# EAGLE board dual_encoder_shield_5v (EAGLE 9.6.2)
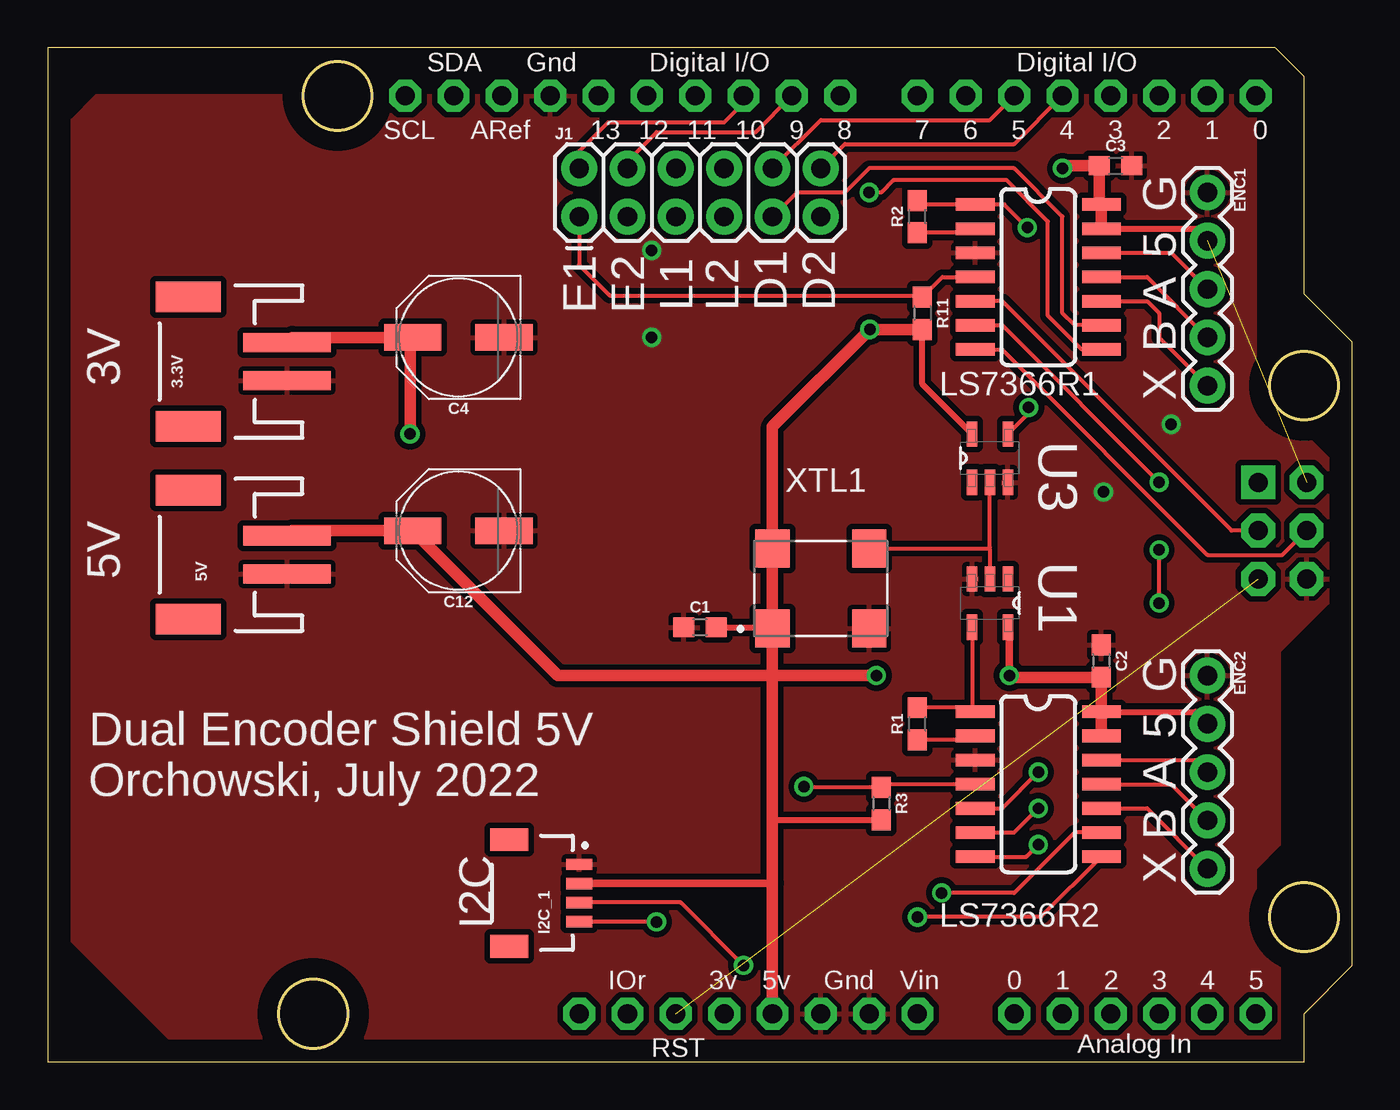
[diagram p0: board, top side]
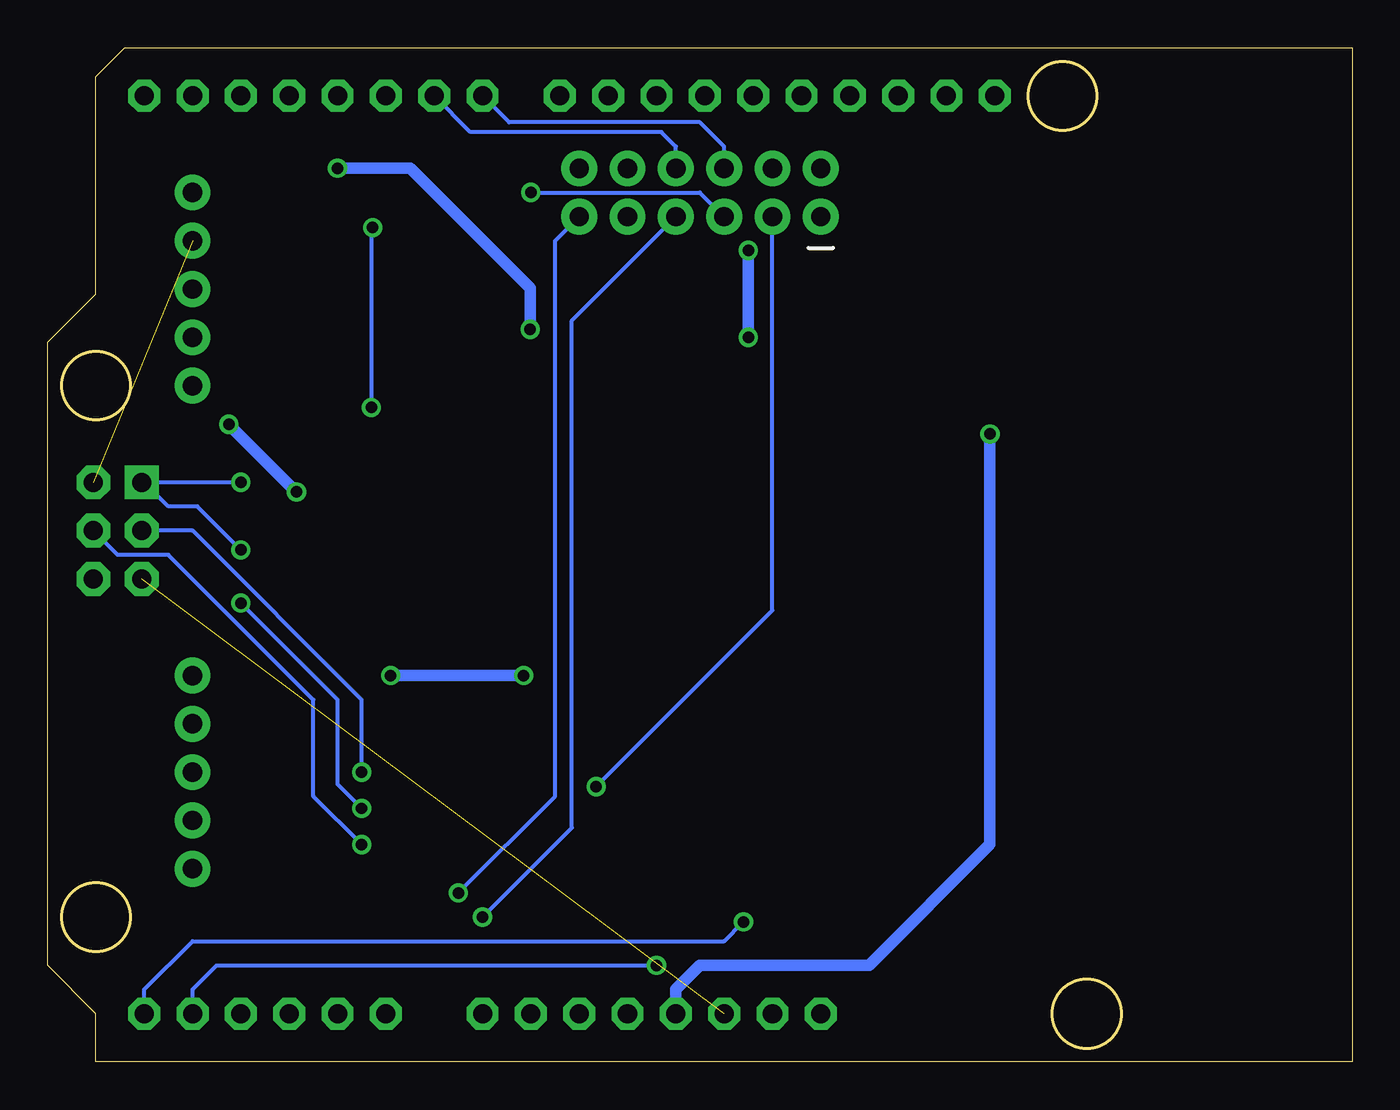
[diagram p1: board, bottom side, seen from below]

Size 55.68 x 51.87 mm. Coordinates in mm from the lower left corner, seen from the top.
Outline: circle at 3.09,50.08 radius 1.8
Outline: circle at 53.89,34.84 radius 1.8
Outline: circle at 53.89,6.9 radius 1.8
Outline: circle at 1.82,1.82 radius 1.82
Copper layers (1*16): Top 0.035mm / dielectric 1.5mm / Bottom 0.035mm
Design rules "default": minimum track width 6mil, minimum drill 0.35mm, track to track 6mil, track to pad 6mil, pad to pad 6mil, via to via 6mil, smd to smd 6mil, copper to edge 40mil, drill to drill 6mil, minimum pad ring 10mil, minimum via ring 8mil, stop-mask expansion 4mil, vias tented up to drill 0mil, thermal gap 10mil

## Footprints (pad centres in the part's own frame; a part is rotated, then mirrored left to right if it is on the bottom)
JST-2-SMD = smd 1 x 4.6: 1 -1,-3.7; 2 1,-3.7 | smd 1.6 x 3.4: NC1 -3.4,1.5; NC2 3.4,1.5
0603 = smd 1.1 x 1: 1 -0.85,0; 2 0.85,0
PANASONIC_D = smd 3 x 1.4: + 2.4,0; - -2.4,0
1X05 = drill 1.016 pad 1.88: 1 0,0; 2 2.54,0; 3 5.08,0; 4 7.62,0; 5 10.16,0
JST04_1MM_RA = smd 0.6 x 1.35: 1 -1.5,0; 2 -0.5,0; 3 0.5,0; 4 1.5,0 | smd 1.2 x 2: NC1 2.8,-3.675; NC2 -2.8,-3.675
2X6 = drill 1.016 pad 1.88: 1 0,0; 2 0,2.54; 3 2.54,0; 4 2.54,2.54; 5 5.08,0; 6 5.08,2.54; 7 7.62,0; 8 7.62,2.54; 9 10.16,0; 10 10.16,2.54; 11 12.7,0; 12 12.7,2.54
SOIC14 = smd 2.032 x 0.66: 1 -3.315,4.445; 2 -3.315,3.175; 3 -3.315,1.905; 4 -3.315,0.635; 5 -3.315,-0.635; 6 -3.315,-1.905; 7 -3.315,-3.175; 8 3.315,-3.175; 9 3.315,-1.905; 10 3.315,-0.635; 11 3.315,0.635; 12 3.315,1.905; 13 3.315,3.175; 14 3.315,4.445
ARDUINOR3_ICSP = drill 1 pad 1.676 octagon: 3V 35.56,2.54; 5V 38.1,2.54; A0 50.8,2.54; A1 53.34,2.54; A2 55.88,2.54; A3 58.42,2.54; A4 60.96,2.54; A5 63.5,2.54; AREF 23.876,50.8; D0 63.5,50.8; D1 60.96,50.8; D2 58.42,50.8; D3 55.88,50.8; D4 53.34,50.8; D5 50.8,50.8; D6 48.26,50.8; D7 45.72,50.8; D8 41.656,50.8; D9 39.116,50.8; D10 36.576,50.8; D11 34.036,50.8; D12 31.496,50.8; D13 28.956,50.8; GND 26.416,50.8; GND@1 43.18,2.54; GND@2 40.64,2.54; IOREF 30.48,2.54; RESERVED 27.94,2.54; RESET 33.02,2.54; SCL 18.796,50.8; SDA 21.336,50.8; VIN 45.72,2.54 | drill 1 pad 1.778 octagon: 5V_ICSP 66.167,30.48; GND@3 66.167,25.4; MOSI 66.167,27.94; RESET_ICSP 63.627,25.4; SCK 63.627,27.94 | drill 1 pad 1.778 square: MISO 63.627,30.48
SOT95P280X145-5N = smd 1.321 x 0.559: 1 -1.27,0.94; 2 -1.27,0; 3 -1.27,-0.94; 4 1.27,-0.94; 5 1.27,0.94
OSC_CB3LV-5I-50M000000 = smd 1.8 x 2: 1 -2.54,-2.1; 2 2.54,-2.1; 3 2.54,2.1; 4 -2.54,2.1

## Placement (x,y rotation side)
3.3V  [JST-2-SMD]  -3.26,36.11 90 top
5V  [JST-2-SMD]  -3.26,25.95 90 top
C1  100pF  [0603]  22.14,22.14 0 top
C2  0.1uF  [0603]  43.22,20.36 270 top
C3  0.1uF  [0603]  43.98,46.4 0 top
C4  100uF  [PANASONIC_D]  9.44,37.38 180 top
C12  100uF  [PANASONIC_D]  9.44,27.22 180 top
ENC1  [1X05]  48.81,45 270 top
ENC2  [1X05]  48.81,19.6 270 top
I2C_1  [JST04_1MM_RA]  15.79,8.17 270 top
J1  2X6 FEMALE  [2X6]  15.79,43.73 0 top
LS7366R1  LS7366R  [SOIC14]  39.92,39.92 0 top
LS7366R2  LS7366R  [SOIC14]  39.92,13.25 0 top
M1  ARDUINO_R3_ICSP  [ARDUINOR3_ICSP]  -12.15,-0.72 0 top
R1  1M  [0603]  33.57,17.06 90 top
R2  1M  [0603]  33.57,43.73 90 top
R3  1k  [0603]  31.66,12.87 270 top
R11  1k  [0603]  33.82,38.65 270 top
U1  74LVC1G17W5-7  [SOT95P280X145-5N]  37.38,23.41 270 top
U3  74LVC1G17W5-7  [SOT95P280X145-5N]  37.38,31.03 90 top
XTL1  OSC-40MHZ  [OSC_CB3LV-5I-50M000000]  28.49,24.17 0 top

## Library data of the parts
3.3V 5V = SparkFun-Connectors; PROD_ID: CONN-11443
C1 = SparkFun-Capacitors; PROD_ID: CAP-07883
C2 C3 = SparkFun-Capacitors; PROD_ID: CAP-08604
C4 C12 = SparkFun-Capacitors; PROD_ID: CAP-12547
ENC1 ENC2 = SparkFun-Connectors
I2C_1 = SparkFun-Connectors; PROD_ID: CONN-13694
J1 = SparkFun-Connectors; PROD_ID: CONN-12423
LS7366R1 LS7366R2 = LS7366R; AVAILABILITY: Unavailable; MF: LSI; MP: LS7366R; PACKAGE: None; PRICE: None
M1 = adafruit
R1 R2 = SparkFun-Resistors; PROD_ID: RES-07868
R3 R11 = SparkFun-Resistors; PROD_ID: RES-07856
U1 U3 = 74LVC1G17W5-7; DESCRIPTION: Buffer, Non-Inverting 1 Element 1 Bit per Element Push-Pull Output SOT-25; DIGI-KEY_PART_NUMBER: 74LVC1G17W5-7TR-ND; MF: Diodes Inc.; MP: 74LVC1G17W5-7; PACKAGE: SOT-753 Diodes Inc.; PURCHASE-URL: https://pricing.snapeda.com/search/part/74LVC1G17W5-7/?ref=eda
XTL1 = steveo

## Nets
3.3V: 3.3V.2 C4.+ M1.3V
5V: 5V.2 C1.2 C2.2 C3.1 C12.+ ENC1.2 ENC2.2 I2C_1.2 LS7366R1.13 LS7366R1.14 LS7366R2.13 LS7366R2.14 M1.5V M1.5V_ICSP R3.2 R11.2 U1.5 U3.5 XTL1.1 XTL1.4
A0: M1.A0
A1: M1.A1
A2: M1.A2
A3: M1.A3
A4: I2C_1.3 M1.A4
A5: I2C_1.4 M1.A5
AREF: M1.AREF
CLK: U1.2 U3.2 XTL1.3
ENC1_A: ENC1.3 LS7366R1.12
ENC1_B: ENC1.4 LS7366R1.11
ENC1_DFLAG: J1.9 LS7366R1.9
ENC1_IDX: ENC1.5 LS7366R1.10
ENC1_LFLAG: J1.5 LS7366R1.8
ENC2_A: ENC2.3 LS7366R2.12
ENC2_B: ENC2.4 LS7366R2.11
ENC2_DFLAG: J1.11 LS7366R2.9
ENC2_IDX: ENC2.5 LS7366R2.10
ENC2_LFLAG: J1.7 LS7366R2.8
GND: 3.3V.1 5V.1 C1.1 C2.1 C3.2 C4.- C12.- ENC1.1 ENC2.1 I2C_1.1 LS7366R1.3 LS7366R2.3 M1.GND M1.GND@1 M1.GND@2 M1.GND@3 U1.3 U3.3 XTL1.2
IO0/RX: M1.D0
IO1/TX: M1.D1
IO2: M1.D2
IO3: M1.D3
IO4: J1.12 M1.D4
IO5: J1.10 M1.D5
IO6: J1.8 M1.D6
IO7: J1.6 M1.D7
MISO: LS7366R1.6 LS7366R2.6 M1.MISO
MOSI: LS7366R1.7 LS7366R2.7 M1.MOSI
N$6: LS7366R1.2 R2.1
N$8: LS7366R2.1 R1.2 U1.4
N$9: LS7366R2.2 R1.1
N$10: LS7366R1.1 R2.2 U3.4
PB0: M1.D8
PB1: J1.4 M1.D9
PB2: J1.2 M1.D10
PB3/MOSI: M1.D11
PB4/MISO: M1.D12
PB5/SCK: M1.D13
RESET: M1.RESET M1.RESET_ICSP
SCK: LS7366R1.5 LS7366R2.5 M1.SCK
SCL1: M1.SCL
SDA1: M1.SDA
SS_ENC1: J1.1 LS7366R1.4 R11.1
SS_ENC2: J1.3 LS7366R2.4 R3.1
VIN: M1.VIN

## Tracks (layer width: path | path; a pad name or v marks a point on that pad's centre or on a via)
3.3V  (via drill 0.6)
  Top 0.61: 3.3V.2 0.71,37.38 C4.+ 6.9,37.24 v6.9,32.3
  Bottom 0.61: M1.3V 23.41,3.09 22.14,4.36 13.25,4.36 6.9,10.71 v6.9,32.3
5V  (via drill 0.6)  (1 unrouted)
  Top 0.305: LS7366R1.13 48.17,43.09 ENC1.2 | 43.09,44.36 LS7366R1.14 | LS7366R2.14 48.17,17.69 ENC2.2 | 25.69,21.82 XTL1.1 | XTL1.1 25.95,22.14 | U3.5 33.82,34.91 R11.2 | R3.2 31.62,11.98 25.95,11.98 | C1.2 25.88,22.14 XTL1.1
  Top 0.406: I2C_1.2 25.94,8.67 25.95,8.68 | v38.39,19.6 38.39,22.06 U1.5
  Top 0.61: M1.5V 25.95,8.68 25.95,11.98 | 25.99,12.02 25.95,11.98 | R11.2 v31.07,37.8 25.95,32.68 XTL1.4 XTL1.1 25.95,19.6 | LS7366R2.13 LS7366R2.14 43.23,19.5 C2.2 38.48,19.51 v38.39,19.6 | v31.41,19.6 25.95,19.6 | LS7366R1.14 LS7366R1.13 | 43.09,44.36 43.13,44.4 C3.1 41.32,46.4 v41.19,46.27 | 25.95,11.98 25.95,19.6 | 5V.2 0.71,27.22 C12.+ 14.66,19.6 25.95,19.6
  Bottom 0.61: v38.39,19.6 v31.41,19.6 | v41.19,46.27 37.38,46.27 31.07,39.96 v31.07,37.8
A4  (via drill 0.6)
  Top 0.203: v24.42,4.36 21.12,7.66 I2C_1.3
  Bottom 0.203: M1.A4 48.81,3.09 47.54,4.36 v24.42,4.36
A5  (via drill 0.6)
  Top 0.203: v19.85,6.64 15.81,6.64 I2C_1.4
  Bottom 0.203: M1.A5 51.35,3.09 48.81,5.63 20.87,5.63 v19.85,6.64
CLK
  Top 0.203: XTL1.3 37.31,26.27 | 37.31,26.27 37.38,26.2 U1.2 | 37.31,26.27 37.38,26.34 U3.2
ENC1_A
  Top 0.203: LS7366R1.12 46.9,41.82 ENC1.3
ENC1_B
  Top 0.203: LS7366R1.11 45.63,40.55 ENC1.4
ENC1_DFLAG
  Top 0.203: LS7366R1.9 41.82,38.01 41.19,38.65 41.19,43.73 38.65,46.27 31.03,46.27 29.76,45 27.22,45 J1.9
ENC1_IDX
  Top 0.203: LS7366R1.10 45.63,39.28 46.27,38.65 46.27,37.38 ENC1.5
ENC1_LFLAG  (via drill 0.6)
  Top 0.203: LS7366R1.8 42.2,36.74 40.43,38.52 40.43,43.47 38.27,45.63 32.3,45.63 31.66,45 v31.03,45
  Bottom 0.203: J1.5 22.14,45 v31.03,45
ENC2_A
  Top 0.203: LS7366R2.12 48.17,15.15 ENC2.3
ENC2_B
  Top 0.203: LS7366R2.11 46.9,13.88 ENC2.4
ENC2_DFLAG  (via drill 0.6)
  Top 0.203: LS7366R2.9 41.82,11.34 38.65,8.17 v34.84,8.17
  Bottom 0.203: v34.84,8.17 29.76,13.25 29.76,42.46 J1.11
ENC2_IDX
  Top 0.203: LS7366R2.10 45.63,12.61 ENC2.5
ENC2_LFLAG  (via drill 0.6)
  Top 0.203: LS7366R2.8 40.06,6.9 v33.57,6.9
  Bottom 0.203: v33.57,6.9 28.87,11.6 28.87,38.27 J1.7
GND  (via drill 0.6)
  Bottom 0.61: v46.9,32.81 v43.35,29.25 | v19.6,37.38 v19.6,41.95
  pour Top (isolate 0.305): -10.88,48.81 -10.88,5.63 -5.8,0.55 52.62,0.55 52.62,4.36 51.35,5.63 51.35,9.44 52.62,10.71 52.62,20.87 55.16,23.41 55.16,31.03 53.89,32.3 52.62,32.3 51.35,33.57 51.35,50.08 -9.61,50.08
IO4
  Top 0.203: J1.12 29.76,47.54 38.65,47.54 M1.D4
IO5
  Top 0.203: J1.10 28.49,48.81 37.38,48.81 M1.D5
IO6
  Bottom 0.203: J1.8 23.41,47.41 24.17,48.17 33.57,48.17 33.95,48.17 34.2,48.17 M1.D6
IO7
  Bottom 0.203: J1.6 20.87,47.41 22.14,48.68 32.17,48.68 M1.D7
MISO  (via drill 0.6)
  Top 0.203: LS7366R2.6 38.65,11.34 v39.92,12.61 | LS7366R1.6 38.01,38.01 v46.27,29.76 | v46.27,23.41 v46.27,26.2
  Bottom 0.203: v39.92,12.61 41.19,13.88 41.19,18.33 v46.27,23.41 | v46.27,29.76 51.35,29.76 | 51.35,29.76 M1.MISO | v46.27,26.2 48.55,28.49 50.08,28.49 51.35,29.76
MOSI  (via drill 0.6)
  Top 0.203: LS7366R1.7 38.01,36.74 48.81,25.95 52.75,25.95 M1.MOSI | LS7366R2.7 39.28,10.07 v39.92,10.71
  Bottom 0.203: v39.92,10.71 42.46,13.25 42.46,18.33 50.08,25.95 52.75,25.95 M1.MOSI
N$6
  Top 0.203: LS7366R1.2 36.39,42.88 R2.1
N$8
  Top 0.203: R1.2 36.39,17.91 LS7366R2.1 36.44,17.86 U1.4
N$9
  Top 0.203: LS7366R2.2 36.39,16.21 R1.1
N$10  (via drill 0.6)
  Top 0.203: R2.2 33.78,44.36 LS7366R1.1 38.14,44.36 v39.35,43.16 | v39.41,33.7 39.41,33.39 U3.4
  Bottom 0.203: v39.41,33.7 39.41,43.09 v39.35,43.16
PB1
  Top 0.203: J1.4 18.33,46.65 19.85,48.17 25.06,48.17 M1.D9
PB2
  Top 0.203: J1.2 15.79,47.16 17.31,48.68 23.41,48.68 24.42,49.7 M1.D10
RESET  (1 unrouted)
SCK  (via drill 0.6)
  Top 0.203: M1.SCK 50.08,27.22 38.01,39.28 LS7366R1.5 | LS7366R2.5 38.01,12.61 v39.92,14.52
  Bottom 0.203: v39.92,14.52 39.92,18.33 48.81,27.22 M1.SCK
SS_ENC1
  Top 0.203: J1.1 15.79,41.19 17.4,39.58 33.91,39.58 R11.1 34.88,40.55 LS7366R1.4
SS_ENC2  (via drill 0.6)
  Top 0.203: LS7366R2.4 31.83,13.88 R3.1 27.64,13.72 v27.6,13.76
  Bottom 0.203: v27.6,13.76 18.33,23.03 J1.3

## Text on the board
tNames: G | 5 | A | E1 | E2 | L1 | L2 | D1 | D2 | B | 3V | X | 5V | G | Dual Encoder Shield 5V | 5 | Orchowski, July 2022 | A | B | X | I2C